# EAGLE board Redox1.1 Integration Trial (EAGLE 9.6.2)
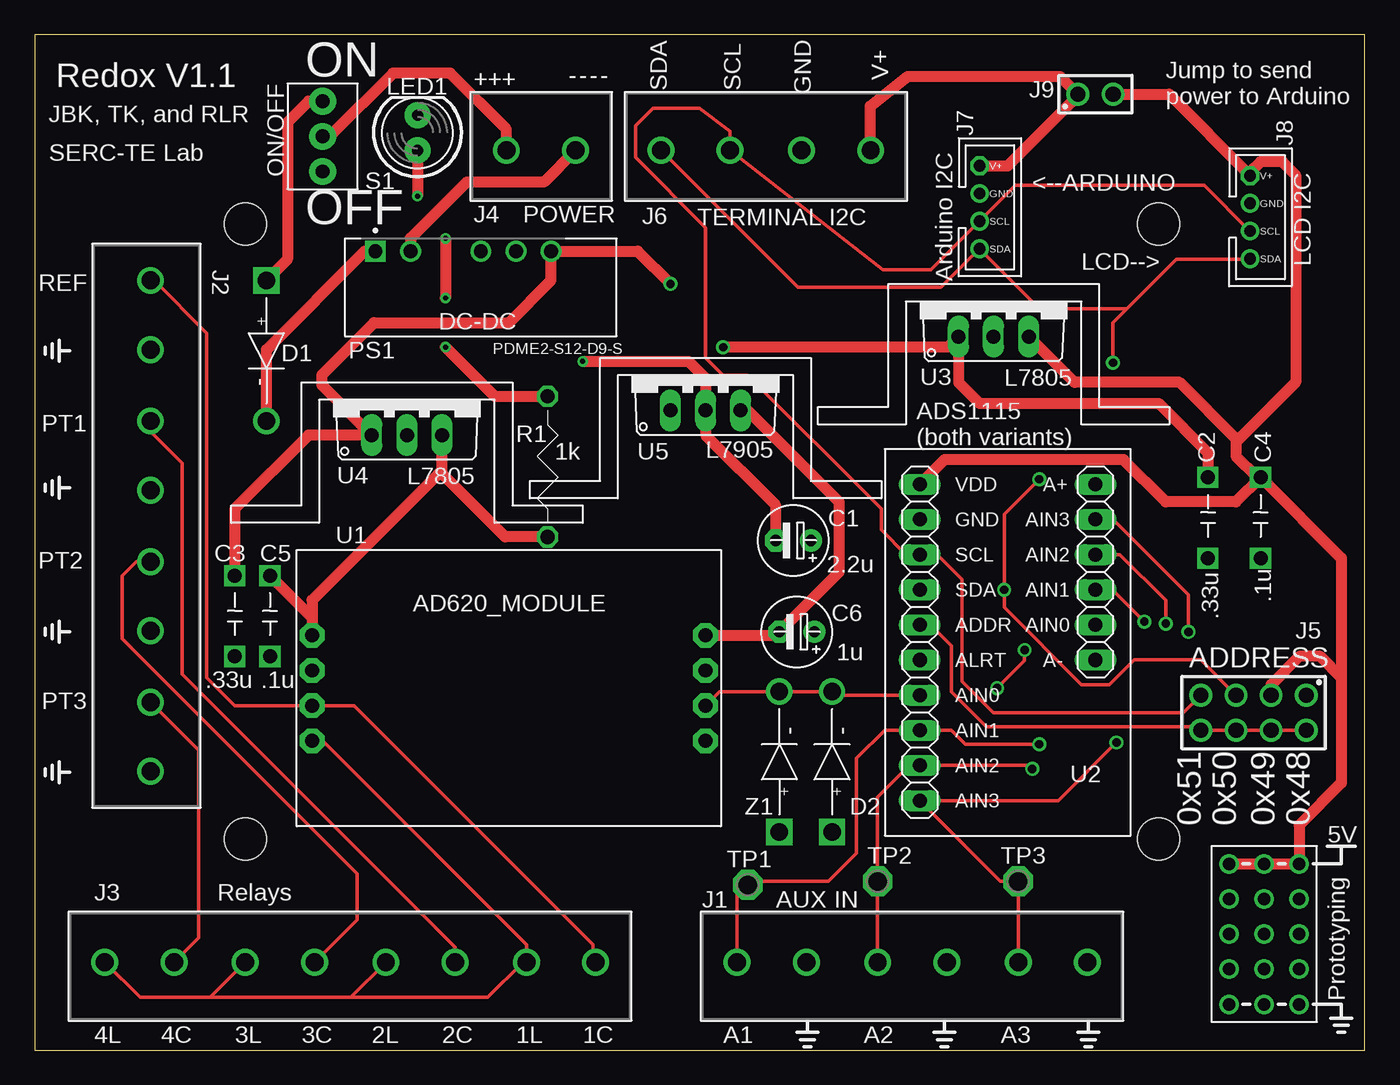
[diagram p0: board, top side]
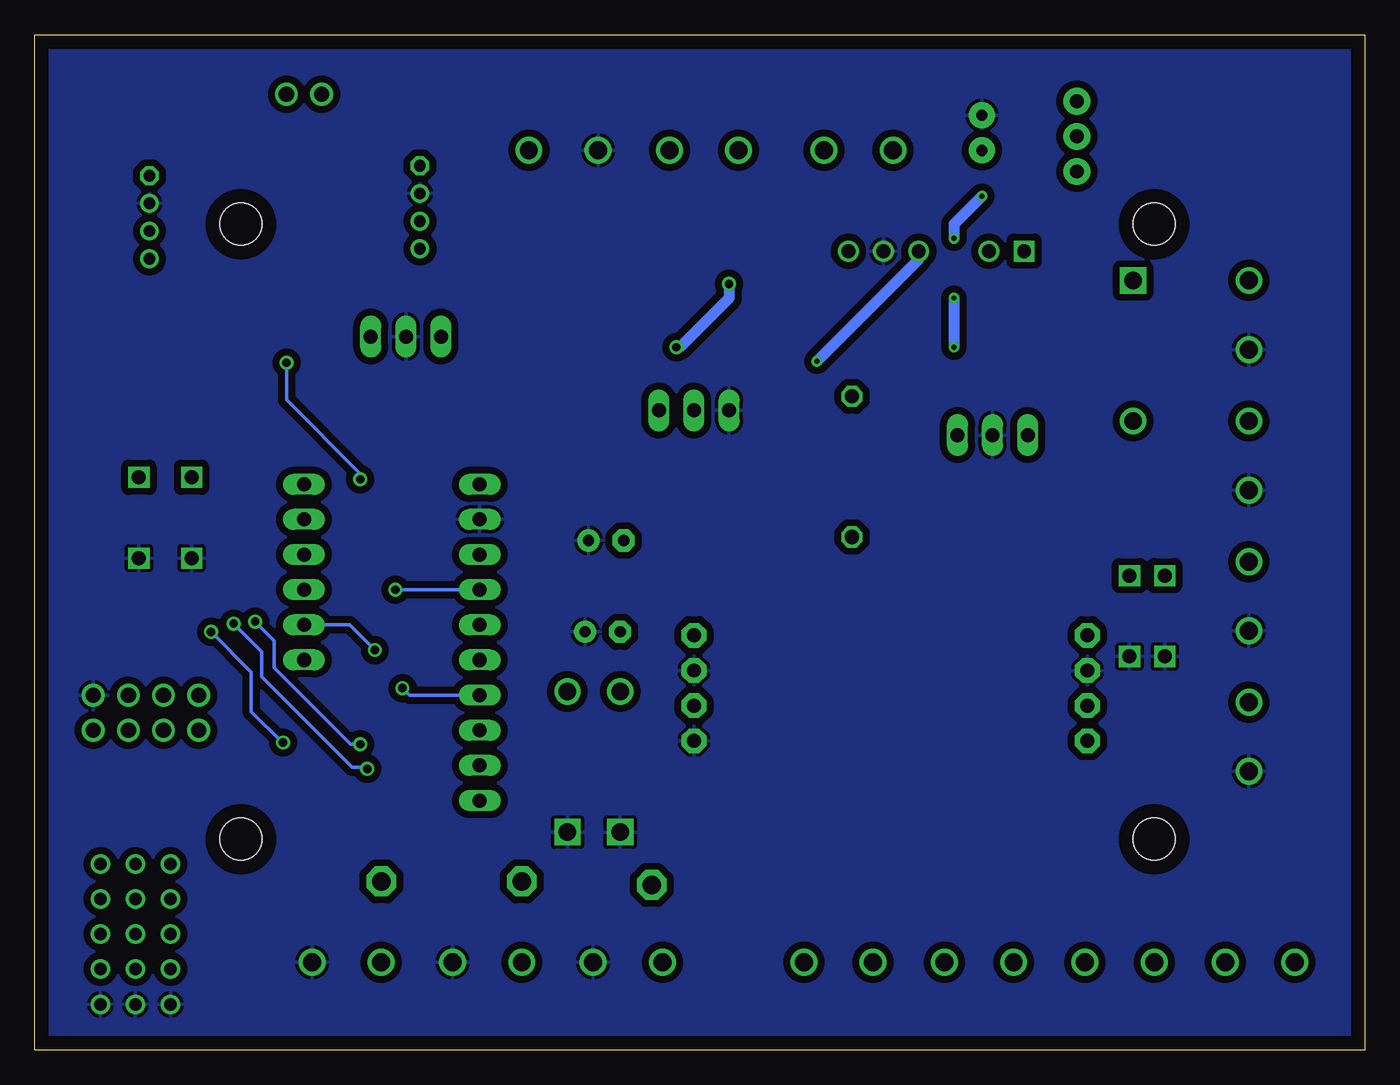
[diagram p1: board, bottom side, seen from below]

Size 96.19 x 73.4 mm. Coordinates in mm from the lower left corner, seen from the top.
Outline: 0,0 96.19,0 96.19,73.4 0,73.4 0,0
Copper layers (1*16): Top 0.035mm / dielectric 1.5mm / Bottom 0.035mm
Design rules "OSH": minimum track width 6mil, minimum drill 0.35mm, track to track 20mil, track to pad 20mil, pad to pad 20mil, via to via 20mil, smd to smd 6mil, copper to edge 40mil, drill to drill 6mil, minimum pad ring 10mil, minimum via ring 8mil, stop-mask expansion 4mil, vias tented up to drill 0mil, thermal gap 10mil
Holes 3.05 mm at 81.28,15.24 15.24,59.69 81.28,59.69 15.24,15.24

## Footprints (pad centres in the part's own frame; a part is rotated, then mirrored left to right if it is on the bottom)
E2,5-5 = drill 0.813 pad 1.6: + -1.27,0 | drill 0.813 pad 1.6 octagon: - 1.27,0
THCAPCERAMIC = drill 1.016 square: C1 -2.794,0; C2 3.048,0
DIODE-TH = drill 1.27 square: P$1 0,0 | drill 1.27: P$2 0,-10.16
6PIN_TERMINAL_5MM = drill 1.295 pad 1.803: 1 -12.7,0; 2 -7.696,0; 3 -2.54,0; 4 2.464,0; 5 7.62,0; 6 12.624,0
8PIN_TERMINAL_5MM = drill 1.295 pad 1.803: 1 0,0; 2 5.004,0; 3 10.16,0; 4 15.164,0; 5 20.32,0; 6 25.324,0; 7 30.48,0; 8 35.484,0
CONN2_710002_WRE = drill 1.295 pad 1.803: 1 0,0; 2 5.004,0
61300821121 = drill 1.1: 1 -3.81,-1.27; 2 -3.81,1.27; 3 -1.27,-1.27; 4 -1.27,1.27; 5 1.27,-1.27; 6 1.27,1.27; 7 3.81,-1.27; 8 3.81,1.27
4PIN_TERMINAL_5MM = drill 1.295 pad 1.803: 1 -7.62,0; 2 -2.616,0; 3 2.54,0; 4 7.544,0
JST_PH_4PIN = drill 0.85 octagon: P$1 -3,0 | drill 0.85: P$2 -1,0; P$3 1,0; P$4 3,0
61300211121 = drill 1.1: 1 -1.27,0; 2 1.27,0
LED-5MM-TH = drill 0.813 pad 1.88: A -1.27,0; K 1.27,0
PROTO_AREA_5X3 = drill 0.9: 1 0,0; 2 2.54,0; 3 5.08,0; 4 0,-2.54; 5 2.54,-2.54; 6 5.08,-2.54; 7 0,-5.08; 8 2.54,-5.08; 9 5.08,-5.08; 10 0,-7.62; 11 2.54,-7.62; 12 5.08,-7.62; 13 0,-10.16; 14 2.54,-10.16; 15 5.08,-10.16
CONV_PDME2-S12-D9-S = drill 1 square: 1 -7.615,2.625 | drill 1: 2 -5.075,2.625; 4 0.005,2.625; 5 2.545,2.625; 6 5.085,2.625
THRESISTOR = drill 1.016 octagon: R1 -5.08,0; R2 5.08,0
TT11_SPDT = drill 1 pad 1.93: P$1 -2.54,0; P$2 0,0; P$3 2.54,0
P1-13 = drill 1.321 pad 2.159 octagon: TP 0,0
AD620_MODULE = drill 1 pad 1.778 octagon: 1 -15.24,3.81; 2 -15.24,1.27; 3 -15.24,-1.27; 4 -15.24,-3.81; 5 13.208,-3.81; 6 13.208,-1.27; 7 13.208,1.27; 8 13.208,3.81
ADS1115_V2 = drill 1.016 long: 1 -11.43,0; 2 -8.89,0; 3 -6.35,0; 4 -3.81,0; 5 -1.27,0; 6 1.27,0; 7 3.81,0; 8 6.35,0; 9 8.89,0; 10 11.43,0; A0 -1.27,12.7; A1 -3.81,12.7; A2 -6.35,12.7; A3 -8.89,12.7; A+ -11.43,12.7; A- 1.27,12.7
TO220V = drill 1.016 long: 1 -2.54,-2.54; 2 0,-2.54; 3 2.54,-2.54

## Placement (x,y rotation side)
C1  2.2u  [E2,5-5]  54.86,36.83 180 top
C2  .33u  [THCAPCERAMIC]  84.84,38.61 270 top
C3  .33u  [THCAPCERAMIC]  14.48,31.5 270 top
C4  .1u  [THCAPCERAMIC]  88.65,38.61 270 top
C5  .1u  [THCAPCERAMIC]  17.02,31.5 270 top
C6  1u  [E2,5-5]  55.12,30.23 180 top
D1  1N5819  [DIODE-TH]  16.76,55.63 0 top
D2  1N5819  [DIODE-TH]  57.66,15.75 180 top
J1  AUX IN  [6PIN_TERMINAL_5MM]  63.5,6.35 0 top
J2  Probes In  [8PIN_TERMINAL_5MM]  8.38,55.63 270 top
J3  Relays  [8PIN_TERMINAL_5MM]  5.08,6.35 0 top
J4  POWER  [CONN2_710002_WRE]  39.12,65.02 180 top
J5  ADDRESS  [61300821121]  88.14,24.38 180 top
J6  TERMINAL I2C  [4PIN_TERMINAL_5MM]  52.83,65.02 180 top
J7  Arduino I2C  [JST_PH_4PIN]  68.33,60.91 270 top
J8  LCD I2C  [JST_PH_4PIN]  87.88,60.2 270 top
J9  5V->Arduino  [61300211121]  76.71,69.09 0 top
LED1  GREEN  [LED-5MM-TH]  27.69,66.29 90 top
PROTO1  PROTO_AREA_5X3  [PROTO_AREA_5X3]  86.36,13.46 0 top
PS1  PDME2-S12-D9-S  [CONV_PDME2-S12-D9-S]  32.26,55.12 0 top
R1  1k  [THRESISTOR]  37.08,42.16 270 top
S1  ON/OFF  [TT11_SPDT]  20.83,66.04 270 top
TP1  PTR1PAD1-13  [P1-13]  51.56,11.94 0 top
TP2  PTR1PAD1-13  [P1-13]  60.96,12.19 0 top
TP3  PTR1PAD1-13  [P1-13]  71.12,12.19 0 top
U1  AD620_MODULE  [AD620_MODULE]  35.31,26.16 0 top
U2  ADS1115_BOV2  [ADS1115_V2]  64.01,29.46 270 top
U3  L7805  [TO220V]  69.34,54.1 0 top
U4  L7805  [TO220V]  26.92,46.99 0 top
U5  L7905  [TO220V]  48.51,48.77 0 top
Z1  NZX5V1B  [DIODE-TH]  53.85,15.75 180 top

## Library data of the parts
C1-C6 D1 D2 J1-J3 J6-J9 LED1 PROTO1 R1 S1 U1-U5 Z1 = !Redox
J4 = !Redox; COPYRIGHT: Copyright (C) 2023 Ultra Librarian. All rights reserved.; MANUFACTURER_PART_NUMBER: 691137710002; MFR_NAME: Wurth Electronics
J5 = Wurth_Connectors_WR-PHD; DATASHEET-URL: https://www.we-online.com/catalog/datasheet/61300821121.pdf; GENDER: Pin Header; IR: 3A; MOUNT: THT; PACKAGING: Bag; PART-NUMBER: 61300821121; PINS: 8; PITCH: 2.54mm; ROWS: Dual; TYPE: Board Stacker
PS1 = PDME2-S12-D9-S; MANUFACTURER: CUI Inc; MAXIMUM_PACKAGE_HEIGHT: 10.41 mm; PARTREV: 1.0; STANDARD: Manufacturer Recommendations
TP1-TP3 = testpad

## Nets
5V-A: C5.C1 R1.R2 U1.1 U4.3
5V-D: C4.C1 J5.3 J8.P$1 J9.2 PROTO1.1 PROTO1.2 PROTO1.3 U2.1 U3.3
-5V-A: C6.- U1.8 U5.3
A1: J1.1 TP1.TP U2.8 U2.A1
A2: J1.3 TP2.TP U2.9 U2.A2
A3: J1.5 TP3.TP U2.10 U2.A3
GND: C1.+ C2.C2 C3.C2 C4.C2 C5.C2 C6.+ D2.P$1 J1.2 J1.4 J1.6 J2.2 J2.4 J2.6 J2.8 J5.1 J6.2 J7.P$2 J8.P$2 LED1.K PROTO1.13 PROTO1.14 PROTO1.15 PS1.5 U1.2 U1.5 U1.7 U2.2 U3.2 U4.2 U5.1 Z1.P$1
N$1: D2.P$2 U1.6 U2.7 U2.A0 Z1.P$2
N$2: C1.- PS1.4 U5.2
N$3: D1.P$2 PS1.1
N$4: J4.1 PS1.2
N$7: C2.C1 C3.C1 PS1.6 U3.1 U4.1
N$8: J4.2 S1.P$2
N$9: LED1.A R1.R1
N$10: D1.P$1 S1.P$1
N$11: J2.3 J3.6
N$12: J2.5 J3.4
N$13: J5.2 J5.4 J5.6 J5.8 U2.5
N$14: J2.7 J3.2
S+: J3.1 J3.3 J3.5 J3.7 U1.4
S-: J2.1 J3.8 U1.3
SCL: J5.7 J6.3 J7.P$3 J8.P$3 U2.3
SDA: J5.5 J6.4 J7.P$4 J8.P$4 U2.4
V+: J6.1 J7.P$1 J9.1

## Tracks (layer width: path | path; a pad name or v marks a point on that pad's centre or on a via)
5V-A
  Top 0.813: C5.C1 20.07,31.24 | 20.07,31.24 20.07,32.51 29.46,41.91 U4.3 29.46,41.66 34.04,37.08 R1.R2 | 20.07,31.24 U1.1
5V-D
  Top 0.813: U2.1 65.79,42.67 78.74,42.67 81.79,39.62 86.87,39.62 C4.C1 | J9.2 82.04,69.09 87.88,63.25 J8.P$1 87.88,63.45 88.65,64.21 90.22,64.21 91.19,63.25 91.19,48.26 86.87,43.94 | U3.3 75.18,48.26 82.8,48.26 86.87,44.2 86.87,43.94 | 86.87,43.94 86.87,42.93 88.39,41.4 C4.C1 | J5.3 89.41,26.42 91.44,28.45 92.96,28.45 94.49,26.92 | 94.49,26.92 94.49,19.3 91.44,16.26 PROTO1.3 PROTO1.2 PROTO1.1 | C4.C1 94.49,35.56 94.49,26.92
-5V-A
  Top 0.813: U5.3 51.56,46.23 58.17,39.62 58.17,34.54 C6.- 53.59,29.97 U1.8
A1  (via drill 0.6)
  Top 0.254: 51.31,11.94 51.56,12.19 57.4,12.19 59.44,14.22 59.44,21.08 61.47,23.11 U2.8 66.29,23.11 67.31,22.1 v72.64,22.1 | 51.31,11.94 50.8,11.43 J1.1 | v80.25,30.97 77.95,33.27 U2.A1 | TP1.TP 51.31,11.94
  Bottom 0.254: v72.64,22.1 73.35,22.1 78.87,27.62 78.87,29.59 v80.25,30.97
A2  (via drill 0.6)
  Top 0.254: J1.3 TP2.TP 60.96,18.29 63.25,20.57 U2.9 71.88,20.57 v72.14,20.32 | v81.79,30.82 81.79,32.51 78.49,35.81 U2.A2
  Bottom 0.254: v72.14,20.32 72.27,20.45 73.22,20.45 79.76,26.99 79.76,28.79 v81.79,30.82
A3  (via drill 0.6)
  Top 0.254: J1.5 TP3.TP 69.85,12.19 69.6,12.45 U2.10 74.04,18.03 v78.23,22.23 | v83.43,30.23 83.43,32.9 77.98,38.35 U2.A3
  Bottom 0.254: v78.23,22.23 78.3,22.23 80.52,24.44 80.52,27.31 v83.43,30.23
GND
  pour Bottom: 0.51,72.9 0.51,0.76 95.76,0.76 95.76,72.9
N$1  (via drill 0.6)
  Top 0.254: U1.6 49.53,25.91 Z1.P$2 D2.P$2 57.91,25.65 U2.7 | v69.6,26.16 71.58,28.15 v71.58,28.91
  Bottom 0.254: U2.7 69.09,25.65 v69.6,26.16 | v71.58,28.91 73.41,30.73 U2.A0
N$2  (via drill 0.35)
  Top 0.813: C1.- 53.59,39.37 48.51,44.45 U5.2 48.51,48.57 47.3,49.78 v39.62,49.78
  Bottom 0.813: PS1.4 32.26,57.15 v39.62,49.78
N$3
  Top 0.813: PS1.1 23.88,57.74 16.76,50.63 D1.P$2
N$4
  Top 0.813: J4.1 36.83,62.74 31.24,62.74 27.18,58.68 PS1.2
N$7  (via drill 0.6)
  Top 0.813: C3.C1 14.48,39.12 19.81,44.45 U4.1 20.78,48.06 20.78,48.81 24.55,52.58 34.29,52.58 37.34,55.63 PS1.6 43.6,57.74 v45.97,55.37 | v49.78,50.8 66.04,50.8 U3.1 66.8,48.26 68.33,46.74 81.28,46.74 84.84,43.18 C2.C1
  Bottom 0.813: v49.78,50.8 49.53,50.8 45.97,54.36 v45.97,55.37
N$8
  Top 0.813: S1.P$2 21.34,66.04 25.91,70.61 30.05,70.61 34.11,66.55 J4.2
N$9  (via drill 0.35)
  Top 0.813: LED1.A v27.69,61.72 | v29.72,58.67 v29.72,54.36 | v29.72,50.8 33.27,47.24 R1.R1
  Bottom 0.813: v27.69,61.72 29.72,59.69 v29.72,58.67 | v29.72,54.36 v29.72,50.8
N$10
  Top 0.813: D1.P$1 18.29,57.15 18.29,67.06 19.81,68.58 S1.P$1
N$11
  Top 0.254: J3.6 30.4,7.44 10.67,27.18 10.67,42.42 8.38,44.7 J2.3
N$12
  Top 0.254: J2.5 7.37,35.31 6.35,34.29 6.35,29.72 23.31,12.76 23.31,9.42 J3.4
N$13
  Top 0.254: J5.2 J5.4 J5.6 J5.8 84.07,23.37 68.83,23.37 66.29,25.91 66.29,29.21 64.77,30.73 U2.5
N$14
  Top 0.254: J3.2 11.86,8.13 11.86,21.67 J2.7
S+
  Top 0.254: U1.4 20.83,22.35 35.56,7.62 J3.7 35.31,6.35 32.77,3.81 22.86,3.81 | J3.1 7.62,3.81 12.7,3.81 | 12.7,3.81 J3.3 | 12.7,3.81 22.86,3.81 | 22.86,3.81 J3.5
S-
  Top 0.254: J3.8 40.39,6.53 40.39,7.62 23.11,24.89 U1.3 14.48,24.89 12.45,26.92 12.45,51.82 8.64,55.63 J2.1
SCL
  Top 0.254: J5.7 83.06,24.38 69.34,24.38 67.06,26.67 67.06,34.04 65.28,35.81 U2.3 62.99,35.81 61.21,37.59 61.21,39.12 51.56,48.77 49.78,48.77 48.51,50.04 48.51,59.44 43.43,64.52 43.43,66.8 44.7,68.07 48.08,68.07 50.29,66.4 J6.3 61.33,56.39 64.8,56.39 J7.P$3 70.91,62.5 84.58,62.5 J8.P$3
SDA  (via drill 0.6)
  Top 0.254: J6.4 55.19,55.12 65.53,55.12 J7.P$4 72.64,53.59 78.99,53.59 | J5.5 84.33,28.19 79.5,28.19 77.72,26.42 75.69,26.42 70.1,32 v70.1,33.27 70.1,38.71 v72.64,41.25 | J8.P$4 87.83,57.15 82.55,57.15 78.99,53.59 | v77.98,49.68 77.98,52.58 78.99,53.59
  Bottom 0.254: v70.1,33.27 U2.4 | v77.98,49.68 77.98,46.99 72.64,41.66 v72.64,41.25
V+
  Top 0.813: J6.1 60.45,68.22 60.43,68.22 63.11,70.36 74.17,70.36 J9.1 75.44,68.99 70.36,63.91 J7.P$1

## Text on the board
tPlace: ON | - | - | - | - | V+ | Redox V1.1 | + | + | + | SDA | SCL | GND | Jump to send / power to Arduino | JBK, TK, and RLR | SERC-TE Lab | OFF | REF | <--ARDUINO / / / LCD--> | DC-DC | PT1 | ADS1115 / (both variants) | PT2 | PT3 | 0x51 | 0x50 | 0x49 | 0x48 | 5V | Prototyping | 4L | 4C | 3L | 3C | 2L | 2C | 1L | 1C | A1 | A2 | A3